# Altium PCB Optical indication .PcbDoc
Units mil, origin at the board's own origin, x right, y up, seen from the top; angles counter-clockwise.
Board outline 6000 x 4000 mil, 2 copper layers (Top Layer, Bottom Layer); 19 components, 20 nets, 56 pads, 0 vias.
Unrouted connection lines stored in the file: 36.
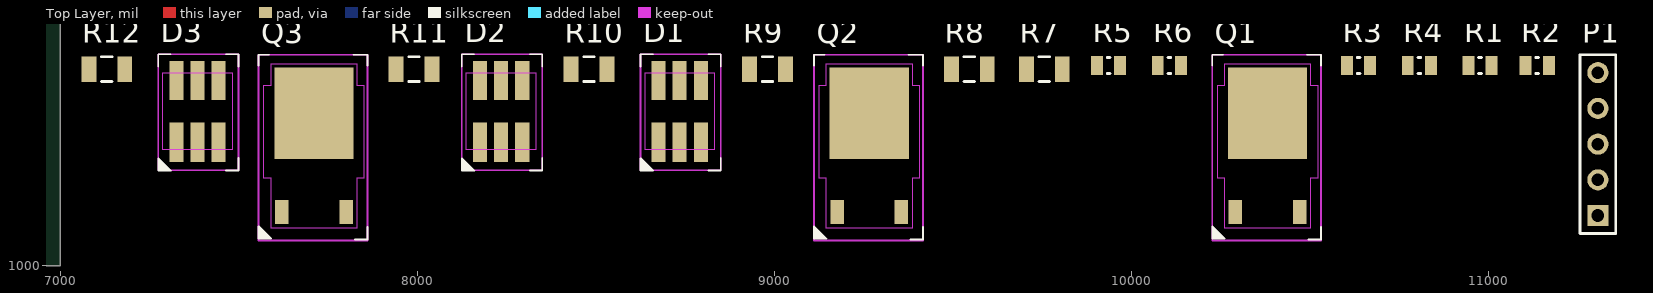
[diagram p0: Top Layer view]
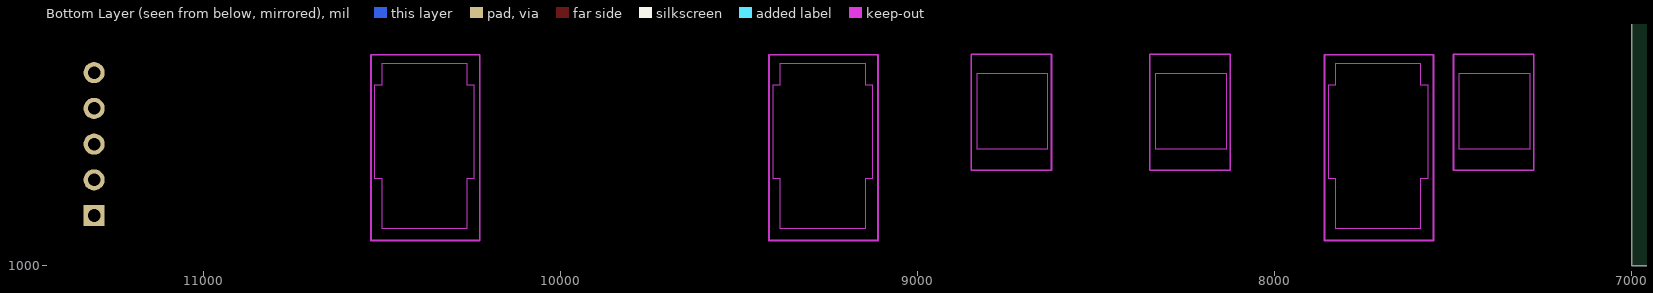
[diagram p1: Bottom Layer view, seen from below]

## Layer stack, top to bottom
Top Solder: solder mask 0.4, Solder Resist, Dk 3.5
Top Layer: signal copper 1.4
Dielectric 1: dielectric 12.6, FR-4, Dk 4.8
Bottom Layer: signal copper 1.4
Bottom Solder: solder mask 0.4, Solder Resist, Dk 3.5

## Board outline
1000,1000 7000,1000 7000,5000 1000,5000

## Design rules (kind name [scope] priority, off if disabled: settings)
Clearance [All] p1: gap=10 ignorepadtopadclearanceinfootprint=FALSE except(0: Arc-Hole Track-Hole SMDPad-Hole THPad-Hole Via-Hole Fill-Hole Poly-Hole Region-Hole Text-Hole)
PolygonConnect [All] p1: connectstyle=Relief reliefconductorwidth=10 reliefentries=4 polygonreliefangle="90 Angle" airgapwidth=10
RoutingVias [All] p1: holewidth=28 width=50 viastyle="Through Hole" minholewidth=28 minwidth=50 maxholewidth=28 maxwidth=50
SolderMaskExpansion [All] p1: expansion=4 istentingtop=FALSE
Width [All] p1: maxlimit=10 minlimit=10 preferedwidth=10
30 further rules are at their usual default settings.

## Classes and differential pairs
component class "Optical indication": D1 D2 D3 P1 Q1 Q2 R1 R2 R3 R4 R5 R6 R7 R8 R9 R10 R11 R12

## Components (designator, comment, footprint, x,y, rotation, side; value= is the part's Value field where it differs from the comment)
D1 "XL-5050RGBC" XL-5050RGBC 8675,1345 r90 top
D2 "XL-5050RGBC" XL-5050RGBC 8175,1345 r90 top
D3 "XL-5050RGBC" XL-5050RGBC 7325,1345 r90 top
P1 "Header 5" HDR1X5 11305,1140 r90 top
Q1 "KND3403A" TO252 10290,1150 r90 top
Q2 "KND3403A" TO252 9175,1150 r90 top
Q3 "KND3403A" TO252 7620,1150 r90 top
R1 "10" RESC2013X50X30LL20T20 10975,1560 r0 top
R2 "150" RESC2013X50X30LL20T20 11135,1560 r0 top
R3 "10" RESC2013X50X30LL20T20 10635,1560 r0 top
R4 "150" RESC2013X50X30LL20T20 10805,1560 r0 top
R5 "10" RESC2013X50X30LL20T20 9935,1560 r0 top
R6 "150" RESC2013X50X30LL20T20 10105,1560 r0 top
R7 "100" FP-CRCW1206-e3-MFG 9755,1550 r0 top
R8 "100" FP-CRCW1206-e3-MFG 9545,1550 r0 top
R9 "100" FP-CRCW1206-e3-MFG 8980,1550 r0 top
R10 "100" FP-CRCW1206-e3-MFG 8480,1550 r0 top
R11 "100" FP-CRCW1206-e3-MFG 7990,1550 r0 top
R12 "100" FP-CRCW1206-e3-MFG 7130,1550 r0 top

## Footprints (in the part's own frame and the unit in brackets; to place one, negate y for a bottom-side part, rotate by r counter-clockwise, add the part's x,y. Pads: shape width x height; smd on the part's side, far side on the other; paste and mask are expansions set on the pad)
FP-CRCW1206-e3-MFG [mm]
  rect 1.05x1.8 smd paste+0 mask+0: 1(-1.275,0) 2(1.275,0)
  silkscreen extent -0.38,-0.87 0.38,0.87, body extent -1.9,-1 1.9,1, height 0.25
HDR1X5 [mm] "Connector; Header; 5 Position"
  rect 1.5x1.5 hole 0.9: 1(0,0)
  round 1.5 hole 0.9: 2(2.54,0) 3(5.08,0) 4(7.62,0) 5(10.16,0)
  silkscreen extent -1.27,-1.27 11.43,1.27
RESC2013X50X30LL20T20 [mm] "Chip Resistor, 2-Leads, Body 2.00x1.25mm, IPC High Density"
  rect 0.85x1.35 smd: 1(-0.825,0) 2(0.825,0)
  silkscreen extent -0.1,-0.58 0.1,0.58, body extent -1.1,-0.72 1.1,0.72, height 0.5
TO252 [mm]
  rect 1.73x0.96 smd: 1(0,0) 3(0,-4.57)
  rect 6.49x5.63 smd paste-4: 2(7.02,-2.285)
  Keep-Out Layer region: 2.414,1.271 9.018,1.271 9.018,0.763 10.542,0.763 10.542,-5.333 9.018,-5.333 9.018,-5.841 2.414,-5.841 2.414,-5.333 -1.142,-5.333 -1.142,0.763 2.414,0.763
  Keep-Out Layer lines w0.127: -2.031,1.652 11.177,1.652 11.177,-6.095 -2.031,-6.095 -2.031,1.652
  silkscreen extent -1.97,-6.09 11.18,1.65, body extent -0.25,-5.56 9.65,0.99, height 2.7
XL-5050RGBC [mm]
  rect 2.8x1 smd: 1(0,0) 2(0,-1.5) 3(0,-3) 4(4.4,-3) 5(4.4,-1.5) 6(4.4,0)
  Keep-Out Layer region: -0.5,-4 4.9,-4 4.9,1 -0.5,1
  Keep-Out Layer lines w0.127: -1.991,1.294 -1.991,-4.421 6.264,-4.421 6.264,1.294 -1.991,1.294
  silkscreen extent -2.02,-4.42 6.26,1.29

## Part data
P1: "Header, 5-Pin", LatestRevisionDate=17-Jul-2002, LatestRevisionNote="Re-released for DXP Platform.", Publisher="Altium Limited"
Q1 Q2 Q3: "N-CHANNEL MOSFET"
R1 R2 R3 R4 R5 R6: library part CMP-2001-04896-1, Manufacturer="Vishay Dale", Part Number=CRCW08050000Z0EA
R7 R8 R9 R10 R11 R12: library part CMP-2003-04801-2, "RES Thick Film, 100Ω, 1%, 0.25W, 100ppm/°C, 1206", Case Code (Imperial)=1206, Case Code (Metric)=3216, Max Operating Temperature=155°C, Min Operating Temperature=-55°C, Package Quantity=5000, Power Rating=250mW, Resistance=100R, Temperature Coefficient=100ppm/°C, Tolerance=1%, Voltage Rating=200V, Case/Package=1206, Composition="Thick Film", Contact Plating=Tin, Depth=1.6mm, Height=0.55mm, Lead Free="Lead Free", Length=3.2mm, Military Standard=Not, Mount="Surface Mount", Number of Pins=2, Packaging="Tape and Reel", Radiation Hardening=No, Termination=SMD/SMT, Voltage Rating (DC)=200V, Weight=0.000353oz, Width=1.6mm

## Nets (pads, with @x,y where several pads share a name; then routed paths per layer and width w, separated by ;. In a path a pad name is that pad's centre, name@x,y a point inside that pad or via, vN(x,y) a via of type N, cw(c..) or ccw(c..) an arc to the next point about the centre after c; other vN are vias at no path point)
5V: P1.1 R1.1 R3.1 R5.1 R7.1 R8.1 R9.1 R10.1 R11.1 R12.1
blue: P1.4 Q3.1
GND: P1.5 Q1.3 Q2.3 Q3.3
green: P1.3 Q2.1
NetD1_1: D1.1 D2.1 D3.1 Q3.2
NetD1_2: D1.2 D2.2 D3.2 Q1.2
NetD1_3: D1.3 D2.3 D3.3 Q2.2
NetD1_4: D1.4 R7.2
NetD1_5: D1.5 R2.2
NetD1_6: D1.6 R10.2
NetD2_4: D2.4 R8.2
NetD2_5: D2.5 R4.2
NetD2_6: D2.6 R11.2
NetD3_4: D3.4 R9.2
NetD3_5: D3.5 R6.2
NetD3_6: D3.6 R12.2
NetR1_2: R1.2 R2.1
NetR3_2: R3.2 R4.1
NetR5_2: R5.2 R6.1
Red: P1.2 Q1.1